# Altium PCB ss.PcbDoc
Units mil, origin at the board's own origin, x right, y up, seen from the top; angles counter-clockwise.
Board outline 2042 x 2173 mil, 2 copper layers (Top Layer, Bottom Layer); 38 components, 39 nets, 182 pads, 72 vias.
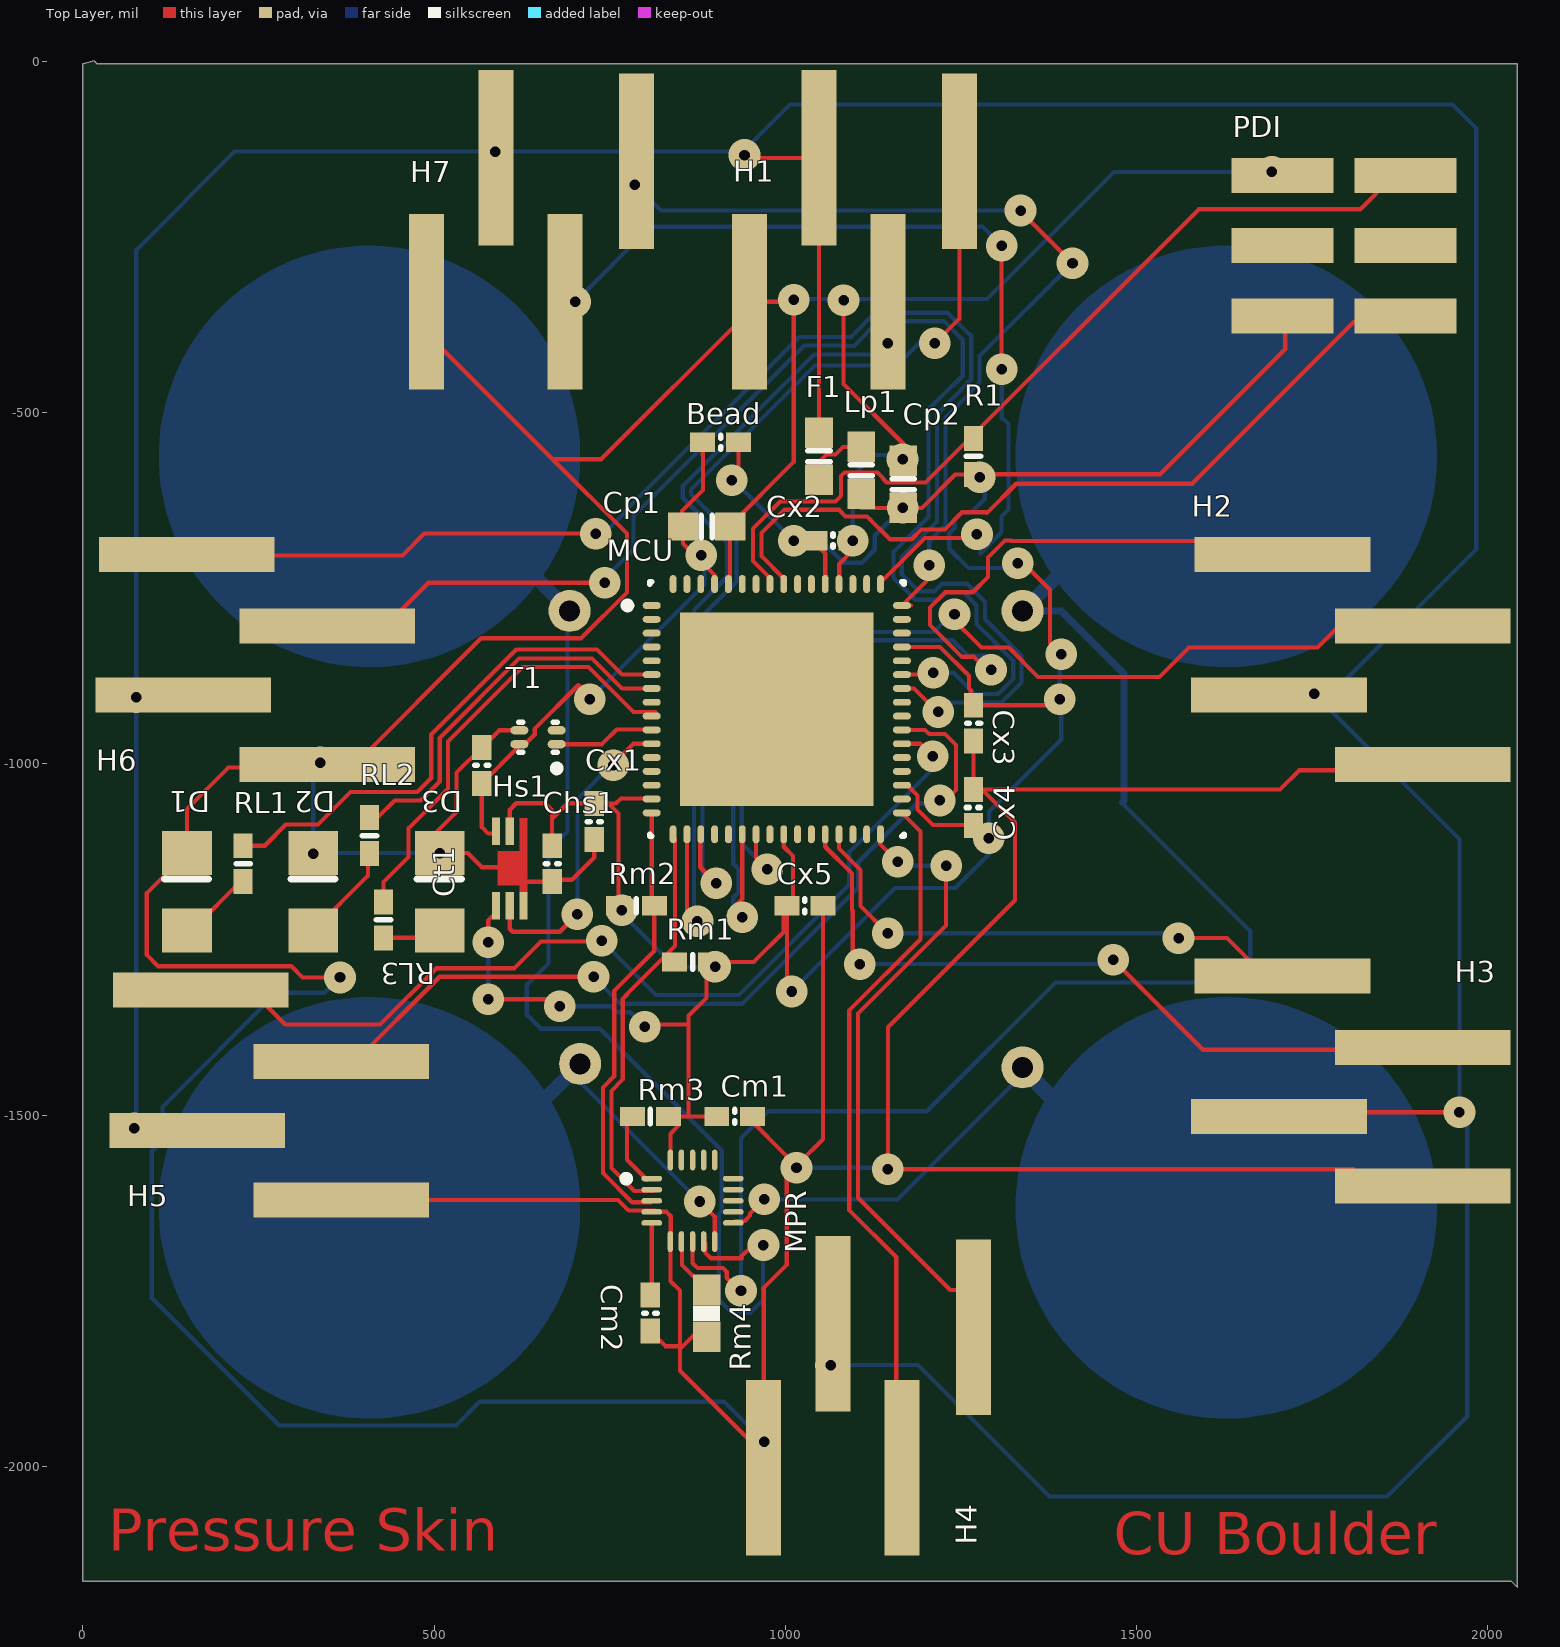
[diagram p0: Top Layer view]
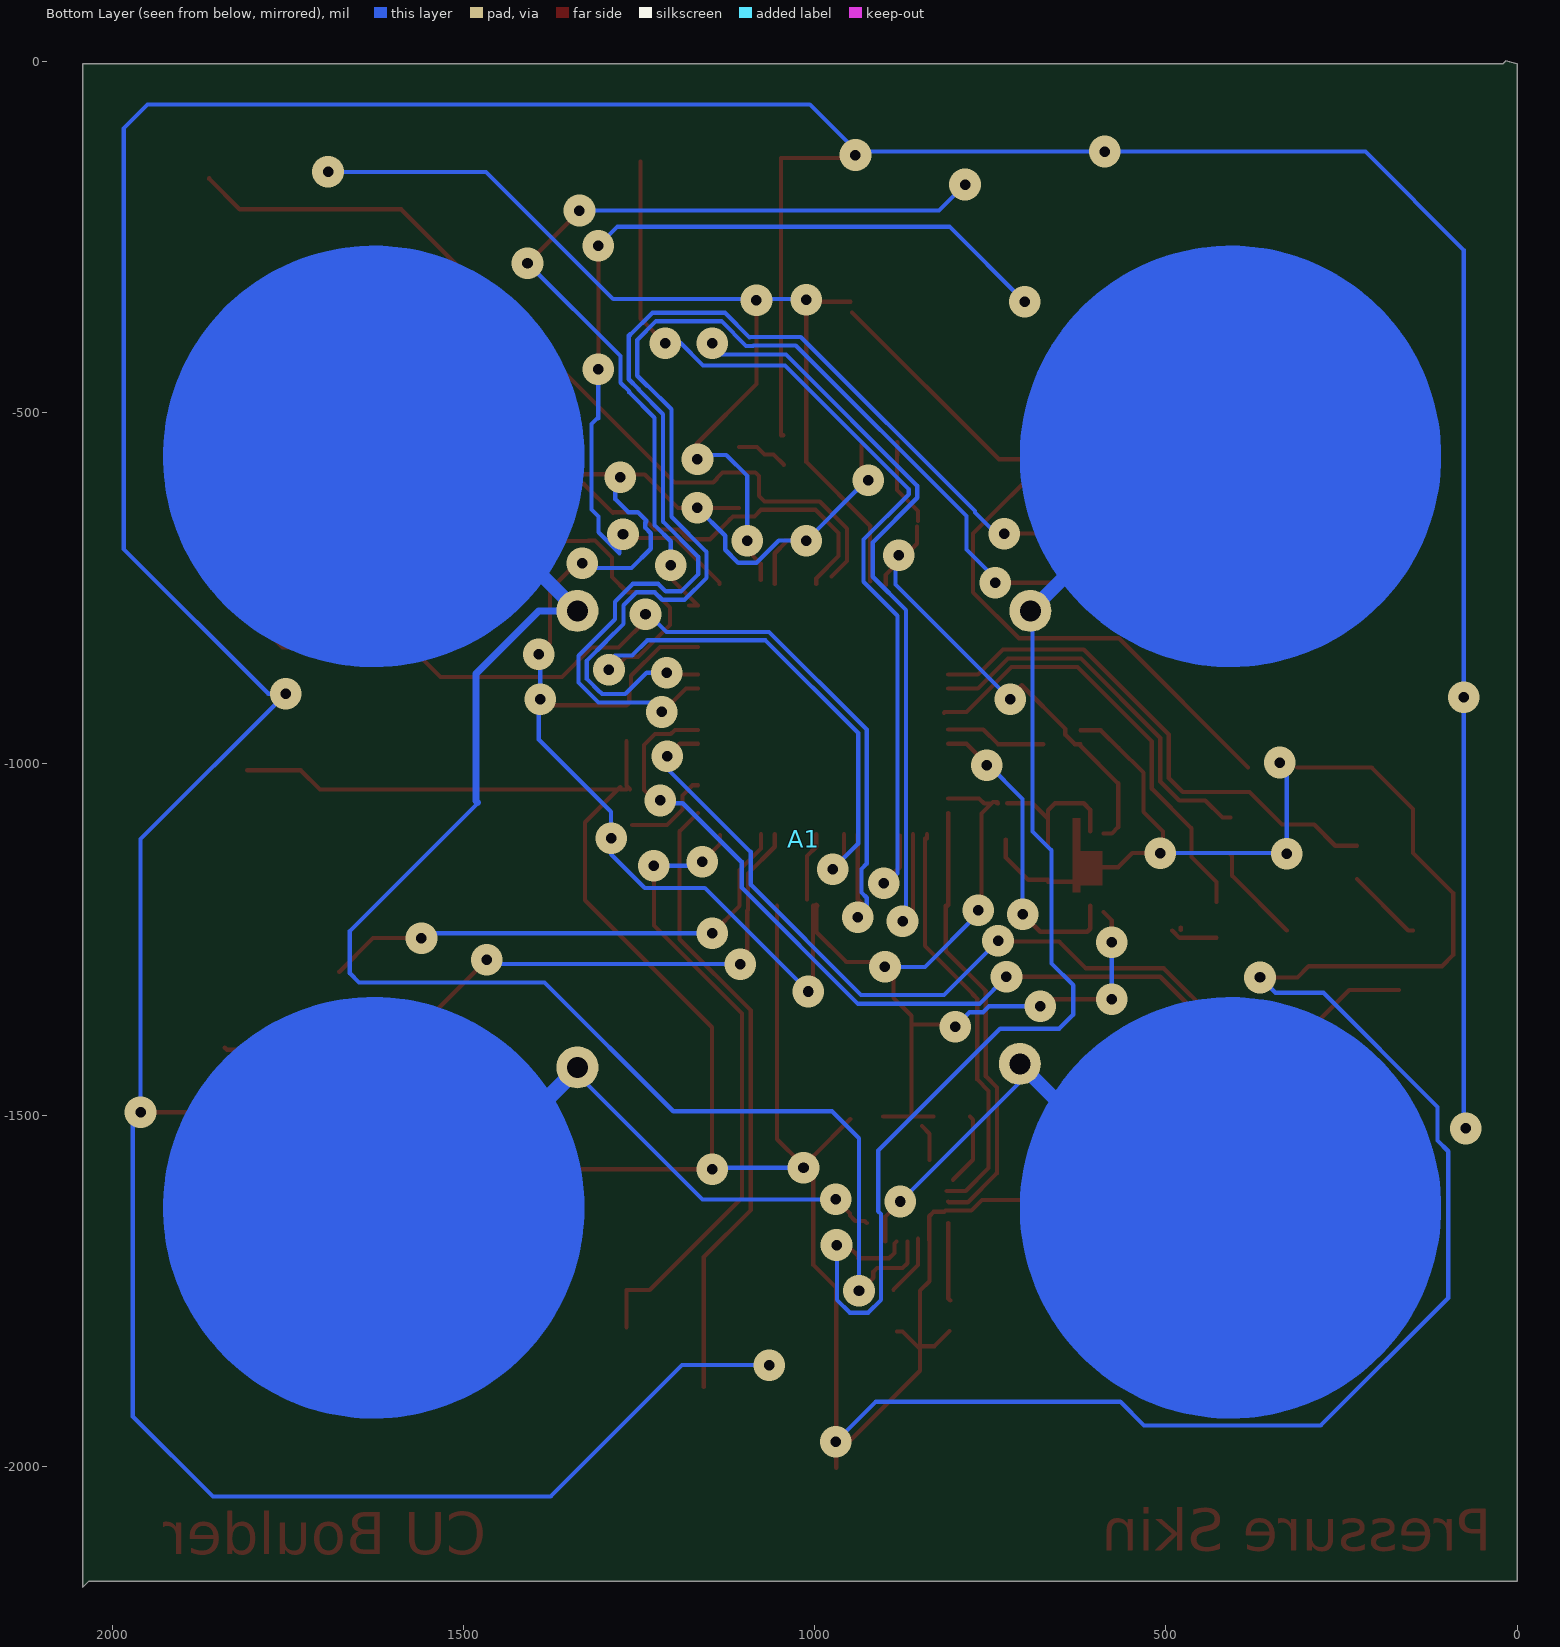
[diagram p1: Bottom Layer view, seen from below]

## Layer stack, top to bottom
Top Layer: signal copper 1.4
Dielectric: dielectric 12.6, FR-4, Dk 4.8
Bottom Layer: signal copper 1.4

## Board outline
0,-3 0,-2164 2034,-2164 2042,-2172 2042,-3 20,-3 16,1

## Design rules (kind name [scope] priority, off if disabled: settings)
Clearance [All] p1: gap=6
MinimumSolderMaskSliver [All] p1: minsoldermaskwidth=1.8
PolygonConnect [All] p1: connectstyle=Relief reliefconductorwidth=10 reliefentries=4 polygonreliefangle="90 Angle"
RoutingVias [All] p1: holewidth=15 width=45 viastyle="Through Hole" minholewidth=15 minwidth=45 maxholewidth=15 maxwidth=45
SilkscreenOverComponentPads [All] p1: minsilkscreentomaskgap=10
SolderMaskExpansion [All] p1: expansion=4
Width [All] p1: maxlimit=350 minlimit=6 preferedwidth=6
26 further rules are at their usual default settings.

## Components (designator, comment, footprint, x,y, rotation, side; value= is the part's Value field where it differs from the comment)
A1 "anodepattern" ANODEPATTERN 1628,-562 r180 bottom
Bead "" C0402-DRL 908,-542 r0 top
Chs1 "" C0402-DRL 668,-1142 r90 top
Cm1 "" C0402-DRL 928,-1502 r180 top
Cm2 "" C0402-DRL 808,-1782 r90 top
Cp1 "" C0603-DRL 888,-662 r0 top
Cp2 "" C0603-DRL 1168,-602 r90 top
Ct1 "" C0402-DRL 568,-1002 r270 top
Cx1 "" C0402-DRL 728,-1082 r90 top
Cx2 "" C0402-DRL 1068,-682 r180 top
Cx3 "" C0402-DRL 1268,-942 r90 top
Cx4 "" C0402-DRL 1268,-1062 r270 top
Cx5 "" C0402-DRL 1028,-1202 r180 top
D1 "LEDSMD" D1206-DRL 148,-1182 r270 top
D2 "LEDSMD" D1206-DRL 328,-1182 r270 top
D3 "LEDSMD" D1206-DRL 508,-1182 r270 top
F1 "FSMF" C0603-DRL 1048,-562 r270 top
H1 "DF3A-4P" UART 948,-342 r90 top
H2 "DF3A-4P" UART 1908,-1002 r180 top
H3 "DF3A-4P" UART 1908,-1602 r180 top
H4 "DF3A-4P" UART 968,-2002 r90 top
H5 "DF3A-4P" UART 368,-1622 r180 top
H6 "DF3A-4P" UART 348,-1002 r180 top
H7 "DF3A-4P" UART 488,-342 r90 top
Hs1 "Hall" HALL 588,-1202 r0 top
Lp1 "" C0603-DRL 1108,-582 r90 top
MCU "ATMEL_XMEGA128" QFN50P900X900X100-64N 988,-922 r0 top
MPR "MPR121" QFN40P300X300X60-20N 868,-1622 r0 top
PDI "PDI" PDI_SMT 1708,-162 r0 top
R1 "R" R0402-DRL 1268,-562 r270 top
RL1 "R" R0402-DRL 228,-1142 r270 top
RL2 "R" R0402-DRL 408,-1102 r270 top
RL3 "R" R0402-DRL 428,-1222 r270 top
Rm1 "R" R0402-DRL 868,-1282 r0 top
Rm2 "R" R0402-DRL 788,-1202 r180 top
Rm3 "R" R0402-DRL 808,-1502 r0 top
Rm4 "R" R0603-DRL 888,-1782 r90 top
T1 "Temp" QFN50P100X130X55-4N 648,-962 r90 top

## Footprints (in the part's own frame and the unit in brackets; to place one, negate y for a bottom-side part, rotate by r counter-clockwise, add the part's x,y. Pads: shape width x height; smd on the part's side, far side on the other; paste and mask are expansions set on the pad)
ANODEPATTERN [mil]
  round 60 hole 30: 1(290,-220) 2(935,-220) 3(920,-865) 4(290,-870)
  Top Layer circle w300: c0,0 r150
  Top Layer circle w300: c1220,0 r150
  Top Layer circle w300: c0,-1070 r150
  Top Layer circle w300: c1220,-1070 r150
  Top Layer lines w10: 985,-935 920,-870 920,-865 ; 985,-930 920,-865 ; 935,-230 935,-220 ; 920,-875 920,-865 ; 290,-870 285,-870 240,-915 230,-915 ; 290,-225 290,-220 ; 225,-155 290,-220 ; 215,-140 290,-215 290,-220 ; 935,-220 1000,-155 935,-220
  Top Layer lines w20: 1120,-35 935,-220 ; 1005,-950 920,-865 ; 290,-220 -32.5,102.5 ; 287.5,-872.5 204,-956 202,-958 141.05,-1018.95 85,-1075
  Top Layer lines w300: 150,-1070 ccw(c0,-1070) 141.05,-1018.95 ccw(c0,-1070) -150,-1070
C0402-DRL [mm] "Chip Capacitor; Body 1.0 x 0.5 mm (LxW typ)"
  rect 0.9x0.7 smd: 1(-0.65,0) 2(0.65,0)
  silkscreen extent 0,-0.25 0,0.25
C0603-DRL [mm] "Chip Capacitor; Body 1.6 x 0.8 mm (LxW typ)"
  rect 1.1x1 smd: 1(-0.85,0) 2(0.85,0)
  silkscreen extent -0.2,-0.4 0.2,0.4
D1206-DRL [mm] "Diode ; Body 3.2 x 1.6 mm (LxW typ)"
  rect 1.6x1.8 smd: 1(-1.4,0) 2(1.4,0)
  silkscreen extent -0.46,-0.81 -0.46,0.79
HALL [mm] "Hall Effect sensor"
  rect 0.3x1 smd: 1(0,0) 2(0.5,0) 3(1,0) 5(0.5,2.7) 6(0,2.7)
  Top Layer region: 0.05,0.731 1,0.731 1,1.981 0.05,1.981
  Top Layer region: 0.85,0.483 1.15,0.483 1.15,3.175 0.85,3.175
PDI_SMT [mm] "WM17457-ND"
  rect 3.68x1.27 smd: 1(0,0) 2(0,-2.54) 3(0,-5.08) 4(4.445,-5.08) 5(4.445,-2.54) 6(4.445,0)
QFN40P300X300X60-20N [mm] "QFN, 20-Leads, Body 3.0x3.0mm (max), Pitch 0.40mm, IPC Medium Density"
  oval 0.75x0.2 smd: 1(-1.475,0.8) 2(-1.475,0.4) 3(-1.475,0) 4(-1.475,-0.4) 5(-1.475,-0.8) 11(1.475,-0.8) 12(1.475,-0.4) 13(1.475,0) 14(1.475,0.4) 15(1.475,0.8)
  oval 0.2x0.75 smd: 6(-0.8,-1.475) 7(-0.4,-1.475) 8(0,-1.475) 9(0.4,-1.475) 10(0.8,-1.475) 16(0.8,1.475) 17(0.4,1.475) 18(0,1.475) 19(-0.4,1.475) 20(-0.8,1.475)
  silkscreen extent -2.52,0.68 -2.27,0.92, body extent -1.5,-1.5 1.5,1.5, height 0.6
QFN50P100X130X55-4N [mm] "QFN, 4-Leads, Body 1.4x1.0mm (max), Pitch 0.50mm, IPC Medium Density"
  oval 0.3x0.65 smd: 1(-0.25,-0.675) 2(0.25,-0.675) 3(0.25,0.675) 4(-0.25,0.675)
  silkscreen extent -1.25,-0.8 0.55,0.7, body extent -0.53,-0.67 0.53,0.67, height 0.55
QFN50P900X900X100-64N [mm] "QFN, 64-Leads, Body 9.1x9.1mm (max), Pitch 0.50mm, IPC Medium Density"
  oval 0.65x0.25 smd: 1(-4.525,3.75) 2(-4.525,3.25) 3(-4.525,2.75) 4(-4.525,2.25) 5(-4.525,1.75) 6(-4.525,1.25) 7(-4.525,0.75) 8(-4.525,0.25) 9(-4.525,-0.25) 10(-4.525,-0.75) 11(-4.525,-1.25) 12(-4.525,-1.75) 13(-4.525,-2.25) 14(-4.525,-2.75) 15(-4.525,-3.25) 16(-4.525,-3.75) 33(4.525,-3.75) 34(4.525,-3.25) 35(4.525,-2.75) 36(4.525,-2.25) 37(4.525,-1.75) 38(4.525,-1.25) 39(4.525,-0.75) 40(4.525,-0.25) 41(4.525,0.25) 42(4.525,0.75) 43(4.525,1.25) 44(4.525,1.75) 45(4.525,2.25) 46(4.525,2.75) 47(4.525,3.25) 48(4.525,3.75)
  oval 0.25x0.65 smd: 17(-3.75,-4.525) 18(-3.25,-4.525) 19(-2.75,-4.525) 20(-2.25,-4.525) 21(-1.75,-4.525) 22(-1.25,-4.525) 23(-0.75,-4.525) 24(-0.25,-4.525) 25(0.25,-4.525) 26(0.75,-4.525) 27(1.25,-4.525) 28(1.75,-4.525) 29(2.25,-4.525) 30(2.75,-4.525) 31(3.25,-4.525) 32(3.75,-4.525) 49(3.75,4.525) 50(3.25,4.525) 51(2.75,4.525) 52(2.25,4.525) 53(1.75,4.525) 54(1.25,4.525) 55(0.75,4.525) 56(0.25,4.525) 57(-0.25,4.525) 58(-0.75,4.525) 59(-1.25,4.525) 60(-1.75,4.525) 61(-2.25,4.525) 62(-2.75,4.525) 63(-3.25,4.525) 64(-3.75,4.525)
  rect 7x7 smd: 65(0,0)
  silkscreen extent -5.52,-4.6 4.6,4.6, body extent -4.55,-4.55 4.55,4.55, height 1
R0402-DRL [mm] "resistor"
  rect 0.9x0.7 smd: 1(-0.65,0) 2(0.65,0)
  silkscreen extent 0,-0.25 0,0.25
R0603-DRL [mm] "Chip Resistor; Body 1.6 x 0.8 mm (LxW typ)"
  rect 1.1x1 smd: 1(-0.85,0) 2(0.85,0)
  silkscreen extent -0.28,-0.48 0.28,0.48
UART [mil] "S1013E-36-ND"
  rect 250x50 smd: 1(0,-1.26) 2(205,-100) 3(0,-198.43) 4(200,-300)

## Part data
Bead Lp1: library part Inductor, "Inductor"
Chs1 Cm1 Cm2 Ct1 Cx1 Cx2 Cx3 Cx4 Cx5: library part Cap, "Capacitor"
Cp1 Cp2: library part Cap2, "Capacitor"
D1 D2 D3: "LED"
F1: "Fuse PTC Reset"
H1 H2 H3 H4 H5 H6 H7: "4pin header"
Hs1: "620-11-ND Hall Effect"
R1 RL1 RL2 RL3 Rm1 Rm2 Rm3 Rm4: "Resistor"
T1: "497-5814-1-ND Temperature sensor"

## Via types
v1: diameter 45, hole 15, Top Layer to Bottom Layer, tented both sides, 72 vias

## Nets (pads, with @x,y where several pads share a name; then routed paths per layer and width w, separated by ;. In a path a pad name is that pad's centre, name@x,y a point inside that pad or via, vN(x,y) a via of type N, cw(c..) or ccw(c..) an arc to the next point about the centre after c; other vN are vias at no path point)
ADCB0: MCU.10 T1.1 | length 144.1
  Top Layer w6: T1.1 739.16,-971.84 760,-951 MCU.10@810,-951
ADCB1: Hs1.2 MCU.11 | length 446
  Top Layer w6: Hs1.2 607.69,-1234.69 612,-1239 679,-1239 v1(704,-1214) ; v1(755,-1002) 755,-1000 783.79,-971.21 MCU.11
  Bottom Layer w6: v1(704,-1214) 704,-1050 v1@755,-999
AVCC: Bead.1 Cp1.1 Ct1.2 Hs1.6 MCU.61 T1.4 | length 815.5
  Top Layer w6: Hs1.6@589,-1099 577,-1099 568,-1090 Ct1.2 622,-973.59 T1.4@622,-972 ; T1.4 629.71,-971.84 643.22,-958.33 643.22,-950.05 705.27,-888 721.5,-904.23 v1(721.5,-908.02) ; Cp1.1@853,-654 853,-640 883,-610 883,-562 ; Cp1.1 854.54,-686.54 899,-731 MCU.61@899,-745 ; Bead.1 882.41,-560.41 883,-561
  Bottom Layer w6: v1(721.5,-908.02) 885,-744.52 885,-707.18 v1(880.38,-702.55)
CLK: MCU.57 PDI.6 R1.1 | length 1218.4
  Top Layer w6: MCU.57@976,-733 954,-711 954,-665 992.88,-626.12 1024.59,-626.12 1029,-626.12 1071.41,-626.12 ; 1072.77,-624.77 1079.31,-618.22 1079.31,-590.08 1084.59,-584.81 1131.41,-584.81 1139.31,-592.71 ; 1139.31,-593.92 1144.59,-599.19 1199.81,-599.19 1588.7,-210.3 1818.7,-210.3 1862,-167 PDI.6@1862,-166
D0: MCU.6 RL1.1 | length 748.7
  Top Layer w6: RL1.1 258.81,-1116.41 288.84,-1086.39 334.61,-1086.39 381,-1040 476,-1040 496,-1020 496,-958 617,-837 732,-837 767.79,-872.79 MCU.6
D1: MCU.7 RL2.1 | length 548.9
  Top Layer w6: RL2.1 419.59,-1076.41 444,-1052 473,-1052 ; 472.41,-1052 473,-1052 ; 767,-892 725,-850 620.97,-850 508,-962.97 508,-1024.97 480.97,-1052 473,-1052 ; 768,-892.47 MCU.7
D2: MCU.9 RL3.1 | length 633.4
  Top Layer w6: RL3.1 428,-1168 463.57,-1132.43 463.57,-1091.66 520,-1035.22 520,-967.94 625.94,-862 720.03,-862 784.11,-926.08 815.08,-926.08 MCU.9@816,-927
DAC0: MCU.8
DATA: MCU.56 PDI.4 | length 1129.7
  Top Layer w6: MCU.56 997.84,-735.84 966,-704 966,-671 998.88,-638.12 1019.62,-638.12 1023,-638.12 1076.59,-638.12 1085.93,-647.46 1116.46,-647.46 ; 1122,-653 1116.46,-647.46 ; 1580,-601 1579.17,-601 ; PDI.4@1841,-371 1809.17,-371 1579.17,-601 ; 1116.46,-647.46 1149,-680 1180.15,-680 1194.03,-666.12 1227.33,-666.12 1251.95,-641.5 1286.05,-641.5 1287.27,-642.73 1329,-601 1579.17,-601
ELE1: A1.1 MPR.8 | length 1839.2
  Top Layer w6: MPR.8 868,-1710.88 875,-1717.88 911.41,-1717.88 916.69,-1723.15 916.69,-1731.69 935,-1750 v1(937,-1750)
  Bottom Layer w6: v1(937,-1750) 937,-1533 975.5,-1494.5 1201.5,-1494.5 1385,-1311 1649,-1311 1662,-1298 1662,-1238 1483,-1059
  Bottom Layer w10: A1.1 1393,-782 1482,-871 1482,-1015 1482,-1053 1480,-1055
ELE2: A1.2 MPR.9 | length 1436.3
  Top Layer w6: MPR.9 886.56,-1682.88 886.56,-1696.26 894.14,-1703.83 935,-1703.83 ; 938.17,-1703.83 935,-1703.83 ; v1(969,-1685) 953.83,-1685 935,-1703.83
  Bottom Layer w6: A1.2@690,-787 690,-1096 663,-1123 663,-1265 663,-1284 632,-1315 632,-1357 652,-1377 736,-1377 909.5,-1550.5 909.5,-1637 905.5,-1641 905.5,-1763.05 923.95,-1781.5 950.05,-1781.5 968.5,-1763.05 968.5,-1685.5 v1(969,-1685)
ELE3: A1.3 MPR.10 | length 329.8
  Top Layer w6: v1(878,-1623) 899.5,-1644.5 MPR.10
  Bottom Layer w6: A1.3@707,-1430 707,-1452 v1(878,-1623)
ELE4: A1.4 MPR.11 | length 734.5
  Top Layer w6: MPR.11 928.88,-1650.68 942.26,-1650.68 949.83,-1643.11 ; 949.83,-1640.17 v1(970,-1620)
  Bottom Layer w6: v1(970,-1620) 1160,-1620 A1.4@1340,-1440
  Bottom Layer w10: 1424,-1518 1424,-1464 1462,-1426
  Bottom Layer w20: A1.4 1338,-1436 1424,-1522
GND: Chs1.1 Cm1.1 Cm2.1 Cp1.2 Cp2.2 Ct1.1 Cx1.1 Cx2.1 Cx3.1 Cx4.1 Cx5.1 D1.1 D2.1 D3.1 H1.1 H2.1 H3.1 H4.1 H5.1 H6.1 H7.1 Hs1.3 MCU.52 MCU.60 MPR.4 MPR.6 PDI.1 Rm4.1 T1.3 | length 10173.8
  Top Layer w6: H6.1@313,-1005 207,-1005 148,-1064 D1.1 91,-1183.88 91,-1272 107,-1288 296.73,-1288 312.73,-1304 v1(366,-1304) ; v1(328,-1128) D2.1 ; H5.1 761.77,-1620.74 777.03,-1636 MPR.4@813.97,-1636 ; H6.1@383,-1005 567,-821 709.15,-821 774.5,-755.65 774.5,-671.95 668.77,-566.23 ; H7.1 489.26,-386.71 668.77,-566.23 ; D3.1@504,-1124 504,-1096.2 532,-1068.2 532,-1012.41 Ct1.1 ; v1(507.88,-1126.88) D3.1 547.88,-1126.88 568,-1147 599,-1147 ; Ct1.1@564,-981 592.84,-952.16 T1.3 ; 628,-1166 629.59,-1167.59 Chs1.1 ; Chs1.1@668,-1165 696,-1165 728,-1133 Cx1.1 ; Cm2.1 829.41,-1829 850,-1829 ; MPR.4@813.99,-1635.99 MPR.4@815.75,-1637.75 ; MPR.4@816,-1638 MPR.4@815.75,-1637.75 ; MPR.6 836.5,-1736.5 850,-1750 850,-1829 ; MPR.6@837,-1678 837,-1644 830.75,-1637.75 MPR.4@815.75,-1637.75 ; 853,-1829 850,-1829 ; Rm4.1@883,-1808 875,-1808 850,-1833 ; MCU.60@921,-740 921.46,-739.54 Cp1.2 ; Cp1.2@921,-661 1012,-570 v1(1012,-339) ; H1.1@947,-357 737.77,-566.23 668.77,-566.23 ; H1.1 v1@1009,-342 ; Cm1.1@949.5,-1505.5 1002,-1558 1002,-1713.5 969.26,-1746.24 ; H4.1@963,-1977 850,-1864 850,-1833 ; 968.5,-1747 969.26,-1746.24 ; H4.1 969.26,-1746.24 ; v1@1019,-1569 1053.59,-1534.41 Cx5.1 ; MCU.52@1077,-738 1077,-715 1093.59,-698.41 Cx2.1 v1(1096,-682) ; v1(1083,-340) 1083,-459 v1@1168,-544 ; 1248,-1577 1248,-1577.12 ; Cx4.1@1263,-1036 1268,-1031 Cx3.1 ; Cx4.1 Cx4.1@1277,-1036.41 ; Cx4.1@1277,-1033 Cx4.1@1280.41,-1036.41 ; 1441,-1577 1440.88,-1577.12 ; H2.1@1808,-1009 1732,-1009 1704.59,-1036.41 Cx4.1@1280.41,-1036.41 ; H3.1@1832,-1600 1809.12,-1577.12 1440.88,-1577.12 ; 850,-1833 850,-1829 ; 1248,-1577.12 1440.88,-1577.12 ; 1248,-1577.12 v1(1146.12,-1577.12) 1146.12,-1374.88 1327,-1194 1327,-1083 Cx4.1@1280.41,-1036.41
  Bottom Layer w6: v1(328,-1128) 328,-1008 v1(338,-998) ; v1@329,-1130 332.12,-1126.88 v1(507.88,-1126.88) ; v1(366,-1304) 344.14,-1325.86 275.8,-1325.86 113.21,-1488.44 113.21,-1536.22 98.04,-1551.39 98.04,-1760.39 279.61,-1941.96 530.99,-1941.96 564.95,-1908 913,-1908 v1(970,-1965) ; v1@1013,-338 v1@1083,-338 ; v1(1016,-1575) 1144,-1575 v1(1146.12,-1577.12) ; v1@1087,-338 1287,-338 1468,-157 v1(1693,-157) ; v1(1096,-682) 1096,-590 1126,-560 v1@1163,-560
  other v1: 1167,-566
IRQ: MPR.1 Rm3.1 | length 103.7
  Top Layer w6: Rm3.1@779,-1502 774.5,-1506.5 774.5,-1563.5 MPR.1@803,-1592
NetCm2_2: Cm2.2 MPR.5 | length 111.7
  Top Layer w6: Cm2.2@807,-1764 809.93,-1761.07 MPR.5
NetD1_2: D1.2 RL1.2 | length 110.3
  Top Layer w6: D1.2 154.88,-1237.12 RL1.2@228,-1164
NetD2_2: D2.2 RL2.2 | length 141.3
  Top Layer w6: D2.2 406.06,-1159.06 406.06,-1130.94 RL2.2@408,-1129
NetD3_2: D3.2 RL3.2 | length 71
  Top Layer w6: RL3.2 480.41,-1247.59 D3.2@491,-1237 ; D3.2@479,-1236.59 D3.2@479,-1233
NetMPR_7: MPR.7 Rm4.2 | length 87
  Top Layer w6: MPR.7@853,-1676 853,-1713.54 Rm4.2
RXD0: H1.3 MCU.18 | length 1194.6
  Top Layer w6: MCU.18 860.05,-1209.05 v1(875,-1224)
  Bottom Layer w6: v1(875,-1224) 870,-1229 870,-781 917.5,-733.5 917.5,-684.5 854,-621 854,-604 1041,-417 v1@1146,-417 ; v1(1146,-401) v1@1146,-417 ; v1@1147,-417 v1@1146,-417
RXD1: H2.3 MCU.22 | length 1399.5
  Top Layer w6: v1@921,-1210 938.79,-1192.21 MCU.22 ; v1@1237,-792 1279.31,-834.31 1318.31,-834.31 1360,-876 1533,-876 1574,-835 ; 1574,-834.31 1757.69,-834.31 H2.3@1792,-800
  Bottom Layer w6: v1(939,-1218) 927,-1218 926,-1219 926,-1190.55 933.5,-1183.05 933.5,-1149.45 926,-1141.95 926,-951 1065,-812 1211,-812 v1@1233,-790
  other v1: 1241,-787
RXD2: H3.3 MCU.28 | length 1011.3
  Top Layer w6: MCU.28 1056.9,-1117.87 1095,-1155.97 1095,-1207.97 1096,-1208.97 1096,-1275 v1(1106,-1285) ; v1@1480,-1279 v1(1467,-1279) 1595,-1407 1837,-1407 H3.3@1840,-1404
  Bottom Layer w6: v1(1106,-1285) 1465,-1285 1467,-1283 v1(1467,-1279)
RXD3: H4.4 MCU.32 | length 915.3
  Top Layer w6: MCU.32@1135,-1101 1135,-1114 v1(1160,-1139) ; v1(1229,-1145) 1229,-1229.97 1103.57,-1355.4 1103.57,-1617.61 1234.95,-1749 H4.4@1267,-1749 ; H4.4 H4.4@1268,-1749
  Bottom Layer w6: v1(1160,-1139) 1166,-1145 v1(1229,-1145)
RXD4: H5.4 MCU.38 | length 1367.6
  Top Layer w6: H5.4 239,-1322 288,-1371 423.03,-1371 503.03,-1291 614,-1291 652,-1253 738,-1253 v1(739,-1252) ; MCU.38 1192.21,-971.21 v1(1210,-989)
  Bottom Layer w6: v1(739,-1252) 816,-1329 934.03,-1329 1091,-1172.03 1091,-1126 ; 1091,-1125 1091,-1126 ; v1@1209,-995 1209,-1008 1091,-1126
RXD5: H6.4 MCU.42 | length 2115.1
  Top Layer w6: H6.4@169,-703 455,-703 486,-672 v1(730,-672) ; MCU.42 1183.47,-892.47 1217,-926 v1(1218,-926)
  Bottom Layer w6: v1(730,-672) 742,-672 772,-642 772,-640 1020,-392 1092,-392 ; 1092.74,-392.74 1127.98,-357.5 1231.02,-357.5 1262.26,-388.74 ; v1(1218,-926) 1231.5,-912.5 1308.02,-912.5 1336.5,-884.02 1336.5,-845.89 1284.5,-793.89 1284.5,-768.98 1259.02,-743.5 1222.98,-743.5 1212.24,-754.24 1190.24,-754.24 1166,-730 1166,-705 1216,-655 1216,-502 1251,-467 ; 1250.5,-466.5 1251,-466 1264.77,-452.2 1264.77,-389.77 1263,-388
RXD6: H7.4 MCU.48 | length 1245.3
  Top Layer w6: MCU.48@1178.64,-774.36 MCU.48 1201,-739.51 ; v1@1335,-213 v1(1409,-287)
  Bottom Layer w6: v1(786,-175) 823,-212 v1(1335,-212) ; v1(1205,-717) 1205,-682.97 1225.99,-661.99 1228,-659.97 1228,-507 1264,-471 1264,-469.94 1276.77,-457.17 1276.77,-419.23 v1(1409,-287)
SCL: MCU.17 MPR.2 Rm1.1 | length 585.5
  Top Layer w6: 774.5,-1327.5 843,-1259 MCU.17@843,-1106 ; 775,-1328 768.5,-1334.5 768.5,-1449.5 752.5,-1465.5 752.5,-1575.5 785,-1608 MPR.2@812,-1608 ; MCU.17@840.36,-1106 MCU.17
SDA: MCU.16 MPR.3 Rm2.1 | length 630.7
  Top Layer w6: MCU.16 809.85,-1200.85 Rm2.1@811,-1202 ; MPR.3@810,-1623 809,-1624 782,-1624 741,-1583 741,-1582.49 740.5,-1581.99 740.5,-1460.53 756.5,-1444.53 756.5,-1323.09 757.8,-1321.8 813.59,-1266 Rm2.1
TXD0: H1.4 MCU.19 | length 1414.2
  Top Layer w6: MCU.19@879,-1102 879,-1147 v1(902,-1170) ; v1(1213,-401) 1248,-366 H1.4
  Bottom Layer w6: v1(902,-1170) 896,-1170 882,-1156 882,-789 930.5,-740.5 930.5,-680.53 866,-616.03 866,-608.97 1042.47,-432.5 1159.05,-432.5 1191.55,-400 v1@1223,-400
TXD1: H2.4 MCU.23 | length 1265.9
  Top Layer w6: 958.47,-1134 MCU.23 ; v1@1288,-867 1268.5,-847.5 1251.5,-847.5 1206,-802 1206,-777.45 1227.95,-755.5 1267.05,-755.5 1288.77,-733.77 1288.77,-706.23 1313,-682 1322,-682 ; 1320.95,-682.5 1590.5,-682.5 H2.4@1592,-684
  Bottom Layer w6: v1(974.47,-1150) 938,-1113.53 938,-955.97 1069.97,-824 1238.45,-824 1259.95,-845.5 1284.5,-845.5 v1@1310,-871
  other v1: 1293,-866
TXD2: H3.4 MCU.29 | length 735.7
  Top Layer w6: MCU.29 1076.58,-1120.58 1107,-1151 1107,-1202 v1(1146,-1241) ; v1(1560,-1248) 1629,-1248 H3.4@1677,-1296
  Bottom Layer w6: v1(1146,-1241) 1174,-1241 ; 1175,-1241 1174,-1241 ; v1(1560,-1248) 1560,-1256 1545,-1241 1174,-1241
TXD3: H4.3 MCU.33 | length 898
  Top Layer w6: H4.3@1158,-1887 1158,-1702 1091,-1635 1091,-1351 1192.43,-1249.57 1192.43,-1095.92 MCU.33
TXD4: H5.3 MCU.39 | length 1215.1
  Top Layer w6: H5.3@384,-1427 508,-1303 v1(727,-1303) ; MCU.39 1198.98,-951.53 1204.95,-957.5 1227.5,-957.5 1243,-973 1243,-1037 v1@1229,-1051
  Bottom Layer w6: v1(727,-1303) 765.55,-1341.55 938.45,-1341.55 1104,-1176 1104,-1140 ; 1104,-1139 1104,-1140 ; v1@1208,-1056 1188,-1056 1104,-1140 ; v1@1208,-1055 1219,-1055 v1@1221,-1053
  other v1: 1220,-1052
TXD5: H6.3 MCU.43 | length 1871.3
  Top Layer w6: H6.3@430,-804 492,-742 v1(743,-742) ; MCU.43 1208.21,-872.79 v1(1211,-870)
  Bottom Layer w6: v1@752,-740 752,-726.55 784,-694.55 784,-647 1027,-404 1087.03,-404 1087.77,-404.74 1097.71,-404.74 1132.95,-369.5 1226.05,-369.5 1252.77,-396.23 1252.77,-447.23 1238.5,-461.5 ; v1(1211,-870) 1239.24,-870 1269.74,-900.5 1303,-900.5 ; 1238,-461 1204,-495 1204,-648 1154,-698 1154,-734.97 1185.27,-766.24 1217.21,-766.24 1227.95,-755.5 1254.05,-755.5 1272.5,-773.95 1272.5,-800.5 1296.79,-824.79 1296.79,-825.24 1324.5,-852.95 1324.5,-879.05 1306.05,-897.5 1305.5,-897.5 1303,-900
TXD6: H7.3 MCU.49 | length 1340.2
  Top Layer w6: H7.3 v1(701,-342) ; MCU.49 1135.64,-741.48 1199,-678.12 v1@1273,-678.12 ; v1(1273,-673) 1273,-676 v1@1278,-681 ; v1(1308,-262) 1308,-437.51 v1(1308.27,-437.78)
  Bottom Layer w6: v1(701,-342) 808,-235 1281,-235 v1(1308,-262) ; v1(1273,-673) 1273,-676 1278,-681 1278,-700 1308,-670 1308,-647.86 1318.04,-637.82 1318.04,-516.04 1310,-508 ; 1308.27,-508 v1(1308.27,-437.78)
VCC: Bead.2 Chs1.2 Cm1.2 Cp2.1 Cx1.2 Cx2.2 Cx3.2 Cx4.2 Cx5.2 Hs1.1 Hs1.5 Lp1.1 MCU.15 MCU.25 MCU.35 MCU.45 MCU.53 MPR.20 PDI.3 R1.2 Rm1.2 Rm2.2 Rm3.2 | length 4511.1
  Top Layer w6: v1(577,-1335) v1@669,-1335 ; v1(577,-1254) 577,-1223 Hs1.1@589,-1211 ; Hs1.5 607.69,-1065.31 617,-1056 658,-1056 668,-1066 668,-1078 ; Chs1.2 668,-1079 668,-1078 ; Cx1.2@726,-1056 690,-1056 668,-1078 ; Cx1.2@739,-1056.41 Cx1.2@740,-1056.41 ; Cx1.2@740,-1054 746,-1054 748.41,-1056.41 ; v1(767.37,-1208.25) 766.21,-1209.41 762.41,-1209.41 Rm2.2 762.41,-1111.59 762.41,-1070.41 748.41,-1056.41 ; v1@801,-1371 862.41,-1371 ; MCU.15@809.85,-1049 766,-1049 758.59,-1056.41 748.41,-1056.41 ; Rm3.2@831,-1502 Rm3.2 Cm1.2 ; MPR.20 836.5,-1526.5 Rm3.2@847.3,-1515.7 ; 862.41,-1500.59 862.41,-1371 ; Rm1.2@888,-1282 888,-1333 862.41,-1358.59 862.41,-1371 ; Rm1.2 955,-1282 998,-1239 Cx5.2@998,-1203 ; Bead.2@933,-545 933.59,-545.59 v1@933.59,-610.59 ; Cx5.2@996,-1202 Cx5.2@997.84,-1200.16 ; MCU.25 997.84,-1117.84 1011,-1131 Cx5.2@1011,-1193 ; Cx5.2@998,-1201 997.84,-1200.84 Cx5.2@997.84,-1200.16 ; Cx5.2@998,-1200 Cx5.2@997.84,-1200.16 ; Cx5.2 1002.41,-1317.41 v1(1009,-1324) ; v1(1012,-682) Cx2.2 ; Cx2.2@1040,-683 1056.9,-699.9 MCU.53 ; Lp1.1@1108,-635.46 1164.46,-635.46 Cp2.1@1168,-639 ; MCU.35 1174.03,-1030.27 1188.5,-1044.74 1188.5,-1065.05 1210.45,-1087 Cx4.2@1260,-1087 ; MCU.45 1220.45,-833.42 1261.5,-874.47 1261.5,-892.5 1264,-895 1264,-913 Cx3.2@1267,-916 ; v1(1167.54,-635) Cp2.1 1194.54,-635.46 1242,-588 R1.2@1266,-588 ; Cx3.2 1381.59,-916.41 1390,-908 v1(1391,-908) ; R1.2 R1.2@1276.41,-587.59 ; v1@1285,-579 R1.2@1276.41,-587.59 ; v1@1332,-716 1334,-716 1334,-719 1336,-721 1337,-720 1345,-720 1377,-752 1377,-828 v1(1393,-844) ; PDI.3@1712,-365 1712,-409 1533.41,-587.59 R1.2@1276.41,-587.59
  Bottom Layer w6: v1(577,-1335) v1(577,-1254) ; v1(679,-1345) 752.03,-1345 760.58,-1353.55 779.55,-1353.55 v1(800,-1374) ; v1(767.37,-1208.25) 767.37,-1213.37 843,-1289 v1(900,-1289) ; 941,-611 v1(1012,-682) ; v1(1009,-1324) 1156.5,-1176.5 1242.05,-1176.5 1290,-1128.55 v1(1290,-1106) 1290,-1068 1393,-965 v1@1393,-906 ; v1@1023,-683 1024.23,-681.77 1051.23,-681.77 1082.95,-713.5 1109.05,-713.5 1127.5,-695.05 1127.5,-675.04 v1(1167.54,-635) ; v1@1284,-598 1284,-623 1265.5,-641.5 1251.95,-641.5 1240,-653.45 1240,-655 1241.24,-656.24 1241.24,-663.7 1233.5,-671.44 1233.5,-693.5 1261,-721 1336,-721 1334,-719 1334,-716 v1@1332,-716 ; v1(1391,-908) 1391,-846 v1(1393,-844)
  other v1: 1331,-714 924,-596 1277,-592
VIN: F1.1 H1.2 H2.2 H3.2 H4.2 H5.2 H6.2 H7.2 | length 7064.2
  Top Layer w6: v1@946,-137 H1.2 F1.1 1048,-532 F1.1@1045,-532 ; H3.2@1712,-1499 1715,-1496 v1(1960,-1496)
  Bottom Layer w6: v1@76,-1516 v1(76,-905) 76,-268 216,-128 v1(587,-128) v1@940,-128 ; v1@949,-127 948,-128 v1@940,-128 ; v1(1065,-1856) 1189,-1856 1376,-2043 1857,-2043 1971,-1929 v1@1971,-1507 ; v1(1960,-1496) 1960,-1107 v1(1753,-900) 1778,-900 1984,-694 1984,-95 1950,-61 1007,-61 v1@940,-128
  other v1: 73,-1519 942,-133
VINPROT: F1.2 Lp1.2 | length 74.5
  Top Layer w6: F1.2@1044,-574 1058.81,-559.19 1071.41,-559.19 1082.07,-548.54 Lp1.2
pads on no net: MCU.1 MCU.2 MCU.3 MCU.4 MCU.5 MCU.12 MCU.13 MCU.14 MCU.20 MCU.21 MCU.24 MCU.26 MCU.27 MCU.30 MCU.31 MCU.34 MCU.36 MCU.37 MCU.40 MCU.41 MCU.44 MCU.46 MCU.47 MCU.50 MCU.51 MCU.54 MCU.55 MCU.58 MCU.59 MCU.62 MCU.63 MCU.64 MCU.65 MPR.12 MPR.13 MPR.14 MPR.15 MPR.16 MPR.17 MPR.18 MPR.19 PDI.2 PDI.5 T1.2

## Other copper
Top Layer:
  text "Pressure Skin" at 36,-2120 h60
  text "CU Boulder" at 1468,-2125 h60